# Altium PCB PCB1.PcbDoc (part 2 of 2)
Units mil, origin at the board's own origin, x right, y up, seen from the top; angles counter-clockwise.
Board outline 2043.78 x 1898.01 mil, 4 copper layers (Top Layer, Layer 1, Layer 2, Bottom Layer), stack 23.756 mil thick; 69 components, 71 nets, 323 pads, 319 vias.
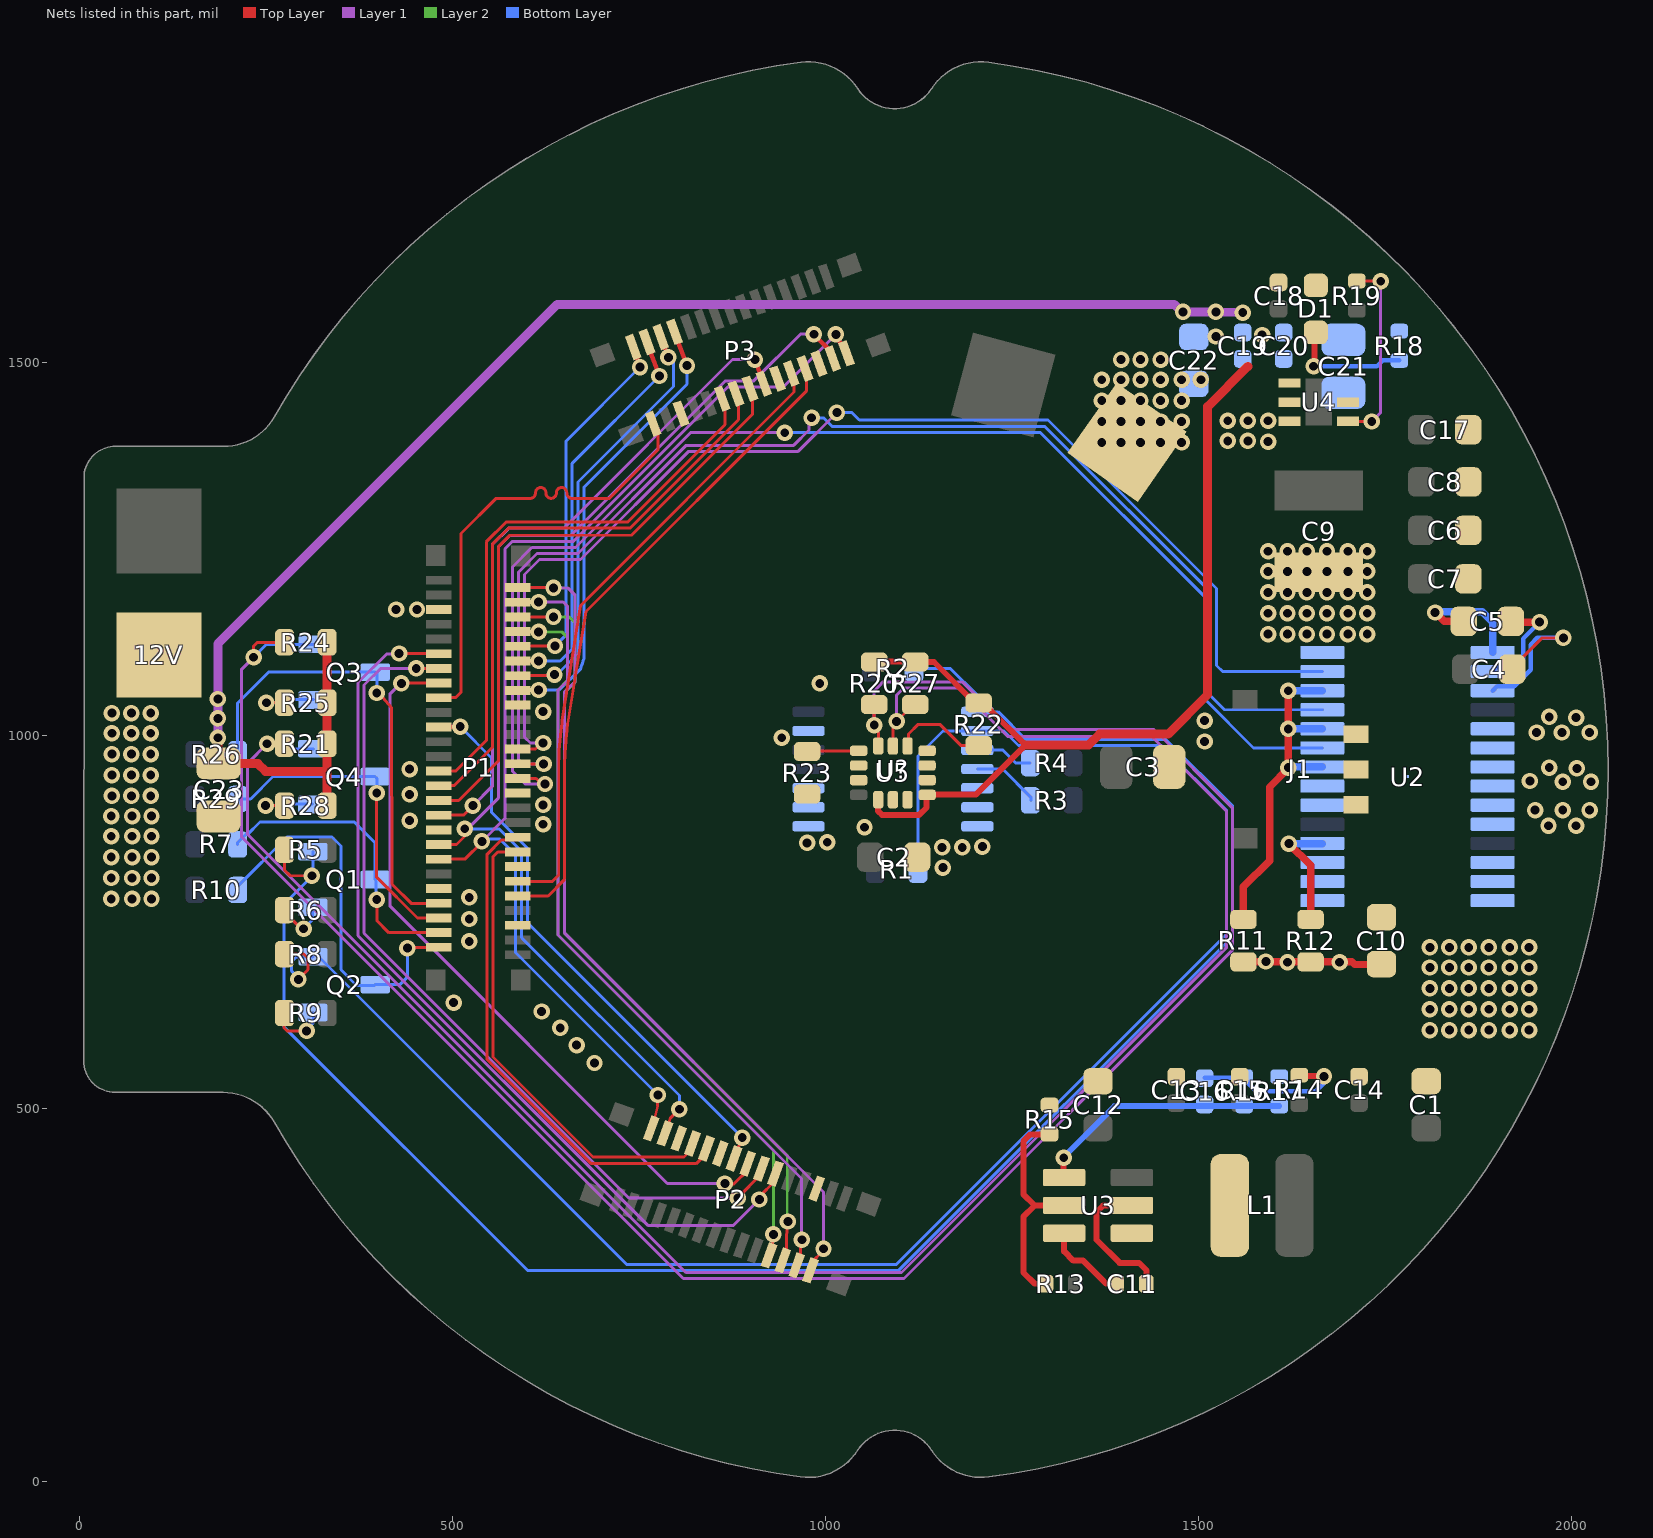
[diagram p4: the nets of this part, all layers, seen from the top]

## Via types
v1: diameter 22, hole 11.9, Top Layer to Bottom Layer, tented both sides, 318 vias
v2: diameter 22, hole 11.9, Top Layer to Bottom Layer, 1 vias

## Nets (pads, with @x,y where several pads share a name; then routed paths per layer and width w, separated by ;. In a path a pad name is that pad's centre, name@x,y a point inside that pad or via, vN(x,y) a via of type N, cw(c..) or ccw(c..) an arc to the next point about the centre after c; other vN are vias at no path point) (continued)
ETHE2_TX_P: P1.17 P3.1 | length 629
  Top Layer w4: P1.17@481.09,1050.7 503.7,1050.7 511,1058 511,1270.9 558.1,1318 601.85,1318 603.85,1318 ccw(c603.85,1325) 610.85,1325 610.85,1325.46 cw(c617.85,1325.46) 624.85,1325.46 624.85,1325 ccw(c631.85,1325) 638.85,1325 638.85,1325.46 cw(c645.85,1325.46) 652.85,1325.46 652.85,1325 ccw(c659.85,1325) 659.85,1318 685.25,1318 710,1318 775,1383 775,1412 P3.1@768,1419
GND: 12V.1 C1.2 C2.2 C3.2 C6.2 C7.2 C8.2 C9.2 C10.2 C12.2 C13.2 C14.2 C15.2 C17.2 C18.2 C19.2 C20.2 C21.2 C22.2 C23.2 D1.1 P1.5 P1.18 P1.30 P1.35 P1.40 P1.43 P1.48 P2.5 P2.19 P2.25 P3.5 P3.19 P3.25 pad.2@1404,1393 R15.2 R17.2 R23.2 U2.6 U2.7 U2.10 U2.12 U2.13 U2.14 U2.20 U2.21 U2.28 U2.29 U3.1 U4.3 U4.5 U5.2 U5.3 U5.6 U5.7 U5.9 U5.10 U5.11 U?.5 U?.6 U?.7 U?.8 U?.9 U?.10 U?.13
  other v1: 690,561 666,585 1810,605 1836,605 1862,605 1889,605 1917,605 1943,605 644,608 619,630 1810,633 1836,633 1862,633 1889,633 1917,633 1943,633 501,642 1810,661 1836,661 1862,661 1889,661 1917,661 1943,661 1810,689 1836,689 1862,689 1889,689 1917,689 1943,689 1810,716 1836,716 1862,716 1889,716 1917,716 1943,716 522,724 522,754 42,781 70,781 96,781 522,783 42,809 70,809 96,809 1157,823 42,837 70,837 96,837 1156,850 1183,850 1210,851 975,856 1002,857 42,865 70,865 96,865 1052,877 621,881 442,886 42,892 70,892 96,892 621,907 43,919 69,919 95,919 442,921 43,947 69,947 95,947 442,955 43,975 69,975 95,975 1508,992 941,997 43,1003 69,1003 95,1003 1508,1020 43,1030 69,1030 95,1030 621,1032 992,1070 1593,1136 1619,1136 1645,1136 1672,1136 1700,1136 1726,1136 1593,1164 1619,1164 1645,1164 1672,1164 1700,1164 1726,1164 424,1169 452,1169 1593,1192 1619,1192 1645,1192 1672,1192 1700,1192 1726,1192 1593,1220 1619,1220 1645,1220 1672,1220 1700,1220 1726,1220 1593,1247 1619,1247 1645,1247 1672,1247 1700,1247 1726,1247 1370,1393 1396,1393 1422,1393 1449,1393 1477,1393 1593,1394 1539,1395 1566,1395 1370,1421 1396,1421 1422,1421 1449,1421 1477,1421 1539,1422 1566,1422 1593,1422 1370,1449 1396,1449 1422,1449 1449,1449 1477,1449 1370,1477 1396,1477 1422,1477 1449,1477 1477,1477 1503,1477 1396,1504 1422,1504 1449,1504
MCU1_Main_Left_SWCLK: P1.4 P2.4 | length 1097.4
  Top Layer w4: P1.4@587,1178.65 587.18,1178.82 614.82,1178.82 v1(615,1179) ; P2.4@961,289 966.38,294.38 966.38,322.38 v1(968,324)
  Layer 1 w4: v1(615,1179) 648,1179 654,1173 654,1112.96 653.95,1112.91 653.95,1073.83 641,1060.88 641,732.69 967.59,406.1 967.59,324.41 v1(968,324)
MCU1_Main_Left_SWDIO: P1.2 P2.2 | length 1141.8
  Top Layer w4: P1.2@587,1198.33 587.17,1198.17 634.83,1198.17 v1(635,1198) ; P2.2@980,284 980,292.49 997,309.49 v1(997,312)
  Layer 1 w4: v1(635,1198) 654,1198 664,1188 664,1072.56 650.02,1058.59 650.02,734.98 997,388 v1(997,312)
MCU1_Main_Right_SWCLK: P1.12 P3.4 | length 542.2
  Top Layer w4: P1.12@587,1099.91 587.05,1099.95 v1(615,1100) v1(615,1100)
  Top Layer w6: P3.4@760,1527 v1(777,1482)
  Bottom Layer w4: v1(615,1100) 644,1100 660,1116 660,1365 v1(777,1482)
MCU1_Main_Right_SWDIO: P1.10 P3.2 | length 499.8
  Top Layer w4: P1.10@587,1119.59 587.2,1119.8 636.8,1119.8 v1(637,1120)
  Top Layer w6: P3.2@742,1521 742.02,1520.94 v1(751,1494)
  Bottom Layer w4: v1(637,1120) 652,1135 652,1395 v1(751,1494)
MCU2_Main_Left_SWCLK: P1.8 P2.8 | length 1027.4
  Top Layer w4: P1.8@587,1139.28 587.14,1139.14 615.86,1139.14 v1@616,1139 ; P2.8@923,303 928.79,308.79 928.79,330.18 v1(929.81,331.21)
  Layer 2 w4: v1(615,1139) 646,1139 654,1131 654,1074 641,1061 641,732.69 930,443.69 930,331.4 v1(929.81,331.21)
MCU2_Main_Left_SWDIO: P1.6 P2.6 | length 1067
  Top Layer w4: P1.6@587,1158.96 v1(635,1159) ; P2.6@943,296 947.31,300.31 947.31,329.42 v1(949.3,348.42)
  Layer 2 w4: v1(635,1159) 656,1159 664,1151 664,1072 650,1058 650,735 948.37,436.63 948.37,349.35 v1(949.3,348.42)
MCU2_Main_Right_SWCLK: P1.16 P3.8 | length 609
  Top Layer w4: P1.16@587,1060.54 587.23,1060.77 614.77,1060.77 v1(615,1061)
  Top Layer w6: P3.8@797.02,1540.96 v1(814,1496)
  Bottom Layer w4: v1(615,1061) 643.04,1061 670.96,1088.92 671.6,1091.21 671.6,1091.49 671.9,1092.27 672.25,1093.52 672.45,1093.73 673.73,1097.1 cw(c1092.35,954.24) 676,1103.59 676,1333 814,1471 v1(814,1496)
MCU2_Main_Right_SWDIO: P1.14 P3.6 | length 575
  Top Layer w4: P1.14@587,1080.22 587.32,1080.55 635.13,1080.55 v1(636.3,1081.72)
  Top Layer w6: P3.6@779,1534 v1(789,1507)
  Bottom Layer w4: v1(636.3,1081.72) 639.72,1081.72 668,1110 668,1340 796,1468 796,1500 v1(789,1507)
NetC4_2: C4.2 U2.3 | length 230.9
  Top Layer w4: C4.2@1921,1089 1921,1091.47 1960.53,1131 v1(1989,1131)
  Bottom Layer w6: U2.3@1894.17,1060.16 1900.03,1066.02 1923.02,1066.02 1945,1088 1945,1122 1954,1131 v1(1989,1131)
NetC5_1: C5.1 U2.2 | length 145
  Top Layer w4: C5.1@1918.5,1153 C5.1@1919.5,1152
  Top Layer w10: C5.1@1919.5,1152 v1(1957,1152)
  Bottom Layer w6: U2.2@1894.17,1085.75 1900.03,1091.61 1923.61,1091.61 1935,1103 1935,1130 v1(1957,1152)
NetC5_2: C5.2 U2.1 | length 168
  Top Layer w10: v1(1817,1165) 1829.04,1153 C5.2@1855.5,1153
  Bottom Layer w10: v1@1816,1166 1880,1166 1894.17,1151.83 U2.1@1894.17,1111.34
NetC10_1: C10.1 R11.2 R12.2 U2.15 U2.16 U2.17 | length 186.9
  Top Layer w10: R11.2@1560,696.46 1560.27,696.73 1589.73,696.73 v1(1590,697) 1590.27,696.73 1649.73,696.73 R12.2@1650,696.46 1689,696.46 1705.54,696.46 1709,693 C10.1@1745,693
  other v1: 1619,696 1689,696
NetC11_1: C11.1 U3.6 | length 112.9
  Top Layer w8: U3.6@1319.53,332.6 1319.53,308.47 1332,296 1345,296 1376,265 C11.1@1390.32,265
NetC11_2: C11.2 L1.1 U3.2 | length 191.2
  Top Layer w8: U3.2@1410.47,370 1372,370 1363,361 1363,324 1394,293 1420,293 1430,283 C11.2@1430,264
NetC16_1: C16.1 R16.2 R17.1 U3.4 | length 343.3
  Top Layer w8: U3.4@1319,408 v1(1319,434)
  Bottom Layer w8: v1@1319,435 1387.32,503.32 R16.2@1561,503.32 R17.1@1608,503.32
NetC16_2: C16.2 R14.2 R16.1 | length 214.7
  Top Layer w4: R14.2@1635,544.68 R14.2@1635.84,543.84 ; v1@1667.16,543.84 v1(1668,543)
  Top Layer w8: R14.2@1635.84,543.84 v1@1667.16,543.84
  Bottom Layer w6: C16.2@1508,541 1559,541 1577,523 1657,523 1668,534 v1(1668,543)
NetD1_2: D1.2 R18.2 | length 165.1
  Top Layer w8: v1(1654,1495) 1655.5,1496.5 1655.5,1539.01 D1.2@1657,1540.51
  Bottom Layer w6: v1(1654,1495) 1739,1495 1747,1503 R18.2@1769,1503
NetJ1_1: J1.1 U2.5
  other v1: 1953,1004 1987,1004 2024,1004 2006,1024 1970,1025
NetJ1_2: J1.2 U2.8
  other v1: 1988,938 2026,938 1944,939 2007,956 1970,957
NetJ1_3: J1.3 U2.9
  other v1: 1969,879 2006,879 1951,900 1988,900 2024,900
NetP1_24: P1.24 U2.27 | length 1648.3
  Top Layer w4: P1.24@587,981.8 610.93,981.8 619.13,990 v1(621,990)
  Layer 1 w4: v1@622,990 v1(621,990) 604,990 596.16,997.84 596.16,1215.84 616.31,1236 671.25,1236 816.25,1381 963,1381 v1(1015,1433)
  Bottom Layer w4: v1(1015,1433) 1035,1433 1045,1423 1298,1423 1524,1197 1524,1094 1532.25,1085.75 U2.27@1665.83,1085.75
NetP1_26: P1.26 U2.25 | length 1737
  Top Layer w4: P1.26@587,962.11 587.13,961.98 621.53,961.98 v1(621.67,961.85)
  Layer 1 w4: v1@622,962 594,962 588,968 588,1219 613,1244 667.94,1244 812.94,1389 957,1389 977.56,1409.56 977.56,1422.56 v1(981,1426)
  Bottom Layer w4: v1(981,1426) 997,1426 1009,1414 1294,1414 1516,1192 1516,1053 1534.43,1034.57 U2.25@1665.83,1034.57
NetP1_28: P1.28 U2.23 | length 1780.1
  Top Layer w4: P1.28@587,942.43 611.7,942.43 619.16,934.97 v1(623.64,934.97)
  Layer 1 w4: v1(623.64,934.97) 597.03,934.97 580,952 580,1226 606,1252 664.63,1252 818.63,1406 v1(945,1406)
  Bottom Layer w4: v1(945,1406) 1288,1406 1508,1186 1508,1049 1573.61,983.39 U2.23@1665.83,983.39
NetP1_45: P1.45 Q3.3 R26.1 | length 637.3
  Top Layer w4: v1(398.07,1057) 399.31,1056.9 400.77,1056.77 401.92,1055.62 417.9,1036.72 418.44,800.87 419.61,799.7 444.22,775.09 P1.45@481.09,775.09
  Bottom Layer w4: R26.1@211.54,975 211.54,1043.54 253,1085 Q3.3@396,1085 398.07,1082.93 v1(398.07,1057)
NetP1_47: P1.47 Q4.3 R29.1 | length 438.3
  Top Layer w4: v1(398.07,923) 398,922.93 398,810 452.6,755.4 P1.47@481.09,755.4
  Bottom Layer w4: R29.1@211.54,915 229,915 259,945 Q4.3@395.73,945 398.07,942.66 v1(398.07,923)
NetP1_49: P1.49 Q1.3 R7.1 | length 404.7
  Top Layer w4: v1(398.07,780) 398.07,751.93 414.28,735.72 P1.49@481.09,735.72
  Bottom Layer w4: R7.1@211.54,854 211.54,856.54 222,867 224.55,867 241.54,884 368,884 396,856 Q1.3@396,807 ; Q1.3@395.73,807 397,805.73 397,781 v1@398,780
NetP1_51: P1.51 Q2.3 R10.1 | length 525.5
  Top Layer w4: v1(439,715) 439.52,715.52 480.58,715.52 P1.51@481.09,716.03
  Bottom Layer w4: R10.1@211.54,793 211.54,797.92 277.62,864 338,864 350,852 350,686 371,665 395,665 Q2.3@396,666 429,666 439,676 v1(439,715)
NetQ1_1: Q1.1 R6.1 | length 71.1
  Top Layer w4: R6.1@274.46,766 274.46,763.46 296.92,741 v1(300,741)
  Bottom Layer w4: v1(300,741) 312,753 312,769.33 Q1.1@312.27,769.6
NetQ1_2: Q1.2 R2.2 R5.1 U?.1 | length 2600.4
  Top Layer w4: R5.1@274.46,847 274.46,819.54 282,812 v1(311,812)
  Bottom Layer w4: v1(311,812) 311,811 274,774 274,609 600,283 1098,283 1545,730 1545,906 1456.28,994.72 1268.28,994.72 1231.23,1031.77 U?.1@1203.22,1031.77 ; v1@312,812 312.27,812.27 Q1.2@312.27,844.4 ; R2.2@1118.54,1090 1167,1090 1203,1054 U?.1@1203,1032
NetQ2_1: Q2.1 R9.1 | length 80.4
  Top Layer w4: R9.1@274.46,628 274,627.54 274,608 278,604 v1(304,604)
  Bottom Layer w4: v1(304,604) 304,606 313,615 313,628.13 Q2.1@312.54,628.6
NetQ2_2: Q2.2 R1.2 R8.1 U?.2 | length 2487.5
  Top Layer w4: R8.1@274,707 R8.1@274.46,707 300,707 306,701 306,686 v1(293,673)
  Bottom Layer w4: v1(293,673) 293,675 284,684 284,697 290,703 312.13,703 Q2.2@312.54,703.4 ; Q2.2@320.75,703 732.75,291 1094.69,291 1537,733.31 1537,900 1450.28,986.72 1258.28,986.72 1238.82,1006.18 U?.2@1203.22,1006.18 1157.18,1006.18 1123.54,972.54 R1.2@1123.54,820
NetQ3_1: Q3.1 R25.1 | length 88.7
  Top Layer w4: v1(250,1044) R25.1@274,1044
  Bottom Layer w4: v1(250,1044) 276,1044 280,1048 Q3.1@313,1048
NetQ4_1: Q4.1 R28.1 | length 89.3
  Top Layer w4: v1(249,906) R28.1@274.46,906
  Bottom Layer w4: v1(249,906) 278,906 280,908 Q4.1@312,908
NetR3_2: R3.2 U?.4 | length 91.7
  Bottom Layer w4: U?.4@1203.22,955 1237.38,955 1275,917.38 R3.2@1275,913
NetR4_2: R4.2 U?.3 | length 78.1
  Bottom Layer w4: U?.3@1203.22,980.59 1237.41,980.59 1255,963 R4.2@1274,963
NetR11_1: R11.1 U2.22 U2.24 U2.26 | length 470
  Top Layer w10: R11.1@1560,753.54 1560,797 1595,832 1595,931 v1@1621,957 ; v1(1620,957) v1(1620,1009) v1(1620,1060)
  Bottom Layer w10: v1(1620,957) 1621,958 1665.62,958 U2.22@1665.83,957.8 ; v1(1620,1009) U2.24@1666,1009 ; v1(1620,1060) U2.26@1666,1060
NetR12_1: R12.1 U2.18 | length 159
  Top Layer w10: v1(1621,855) 1650,826 R12.1@1650,753.54 R12.1@1650,753
  Bottom Layer w10: v1(1621,855) U2.18@1666,855
NetR13_2: R13.2 R15.1 U3.5 | length 303.3
  Top Layer w8: R13.2@1295.32,265 1280,265 1265,280 1265,355 1280,370 ; R15.1@1300,465.32 1274.32,465.32 1265,456 1265,385 1280,370 ; U3.5@1319.53,370 1280,370
NetR19_2: R19.2 U4.4 | length 257.7
  Top Layer w4: U4.4@1700.17,1421.41 1700.58,1421 v1(1732,1421) ; R19.2@1712,1609.39 1712.2,1609.2 1744.8,1609.2 v1@1745,1609
  Layer 1 w4: v1@1732,1422 1732.96,1422 1744,1433.04 v1(1744,1609)
NetR22_2: R22.2 U5.12 | length 127.6
  Top Layer w4: U5.12@1110,986 1111,987 1111,1002 1124,1015 1153,1015 1181.54,986.46 R22.2@1205,986.46
NetR23_1: R23.1 U5.1 | length 69.6
  Top Layer w4: R23.1@975,978.54 975.98,979.53 1043.47,979.53 U5.1@1044,979
NX_CAN_H: P1.39 P2.29 P3.29 | length 1568.6
  Top Layer w4: P1.39@481.09,834.16 516.16,834.16 v1@539,857 ; P2.29@765.98,473.28 770.01,484.51 774.74,503.08 774.74,505.29 774.7,505.3 774.7,517.17 v1(775,518)
  Top Layer w6: v1@1013,1538 P3.29@1028,1511
  Layer 1 w4: v1(539,858) 570,889 570,1250.37 579.97,1260.34 661.66,1260.34 868.81,1467.5 943.3,1467.5 v1(1013.55,1537.75)
  Bottom Layer w4: v1(539,858) 542.44,861.44 550.29,861.44 550.34,861.49 562.51,861.49 584,840 584,709 v1(775,518)
NX_CAN_L: P1.37 P2.27 P3.27 | length 1592.4
  Top Layer w4: P1.37@481.09,853.85 504.85,853.85 517,866 v1@517,875 ; P2.27@784.34,466.89 789.01,479.72 791.58,486.77 v1(803.77,498.96)
  Top Layer w6: v1(984,1538) 984,1537.69 1009.27,1512.42 P3.27@1009.27,1505.52
  Layer 1 w4: v1(516,875) 520.04,875 561,915.96 561,1252.69 576.66,1268.34 658.34,1268.34 865.5,1475.5 903.5,1475.5 966,1538 v1@983,1538
  Bottom Layer w4: v1(516,875) 562,875 592,845 592,729 803.77,517.23 803.77,499.23 v1@804,499
PWM_1: P1.15 P2.15 | length 1006.5
  Top Layer w4: v1(431,1070) 431.19,1070.19 480.9,1070.19 P1.15@481.09,1070.38 ; v1(864.73,399.43) 865.16,399 877,399 896,418 P2.15@896,426
  Layer 1 w4: v1(431,1070) 430,1070 416,1056 416,771 787.57,399.43 864.57,399.43 v1@865,399
PWM_2: P1.31 P3.15 | length 839.3
  Top Layer w4: P1.31@481.09,912.9 507.9,912.9 561,966 561,1253.02 576.49,1268.51 739.45,1268.51 902.06,1431.12 902.06,1460.94 P3.15@898,1465
RS232_ENC_Left_RX: P1.13 P2.13 | length 1142.8
  Top Layer w4: v1(451,1090) P1.13@481.06,1090.03 ; v1(882,380) 882,380.43 913.97,412.4 P2.13@913.97,419.42
  Layer 1 w4: v1(451,1090) 403.31,1090 381,1067.69 381,735 736,380 v1(882,380)
RS232_ENC_Left_TX: P1.11 P2.11 | length 1219.6
  Top Layer w4: v1(428,1110) 428.12,1109.88 480.97,1109.88 P1.11@481.09,1109.75 ; v1(911,378) 911,381.77 932,402.77 P2.11@932,412
  Layer 1 w4: v1(428,1110) 427,1109 411,1109 373,1071 373,731.69 761.37,343.32 876.32,343.32 v1(911,378)
RS232_ENC_Right_RX: P1.29 P3.13 | length 800.6
  Top Layer w4: P1.29@481.09,932.59 481.19,932.68 501.68,932.68 553,984 553,1256.33 574.67,1278 737.63,1278 883,1423.37 883,1455 P3.13@880,1458
RS232_ENC_Right_TX: P1.27 P3.11 | length 769.2
  Top Layer w4: P1.27@481.09,952.27 481.22,952.4 504.02,952.4 545,993.37 545,1259.64 571.36,1286 734.31,1286 865,1416.69 865,1448 P3.11@861,1452
RS232_RX1: P1.38 P2.23 | length 638.6
  Top Layer w4: P1.38@587,844 560.36,844 554,837.64 554,569 688,435 809.8,435 822,447.2 P2.23@822,453
RS232_RX2: P1.44 P3.23 | length 882.2
  Top Layer w4: P1.44@587,784.93 627.93,784.93 648.85,805.85 650.02,809.69 650.02,954.24 cw(c1092.35,954.24) 650.06,959.86 650.27,976.53 651.74,993.14 cw(c1092.35,954.24) 652.41,1000.08 654.07,1016.02 670,1113.78 678.52,1166.21 679.17,1166.86 974,1461.69 974,1490 P3.23@972,1492
RS232_TX1: P1.36 P2.21 | length 690.5
  Top Layer w4: P1.36@587,863.69 583.09,859.78 564.82,859.78 546,840.96 546,565.69 685.69,426 826.21,426 840,439.79 P2.21@840,447
RS232_TX2: P1.42 P3.21 | length 852.8
  Top Layer w4: P1.42@587,804.62 633.64,804.62 640.85,811.83 642.02,813 642.02,957.55 642.27,976.89 642.31,979.89 644.33,999.72 cw(c1092.35,954.24) 644.41,1000.5 646.08,1016.76 646.4,1019.69 646.42,1019.78 671.13,1174.13 957.55,1460.55 957.55,1481.45 P3.21@954,1485
SBUS_1: P1.21 P2.17 | length 766.8
  Top Layer w4: P2.17@877,433 v1(888,461)
  Top Layer w6: P1.21@481.09,1011.33 481.43,1011.66 509.66,1011.66 v1(510,1012)
  Bottom Layer w4: v1(510,1012) 552,970 552,897 600,849 600,749 v1(888,461)
SBUS_2: P1.33 P3.17 | length 900.9
  Top Layer w4: P1.33@481.09,893.22 514.22,893.22 v1(527,906)
  Top Layer w6: v1(905,1504) P3.17@917,1472
  Layer 1 w4: v1(527,906) 553,932 553,1256 575,1278 649,1278 875,1504 v1(905,1504)
SCL_IMU1: Q4.2 R21.2 R27.1 U5.13 | length 2759.5
  Top Layer w4: v1(251,989) 274,989 R21.2@275,990 ; U5.13@1090,986.02 1090,1014 1117,1041 R27.1@1120,1041
  Layer 1 w4: v1(251,989) 225,963 225,867.31 812.31,280 1101.69,280 1537,715.31 1537,898.69 1436.69,999 1243.69,999 1178.69,1064 1105,1064 1095,1054 v1(1095,1019)
  Bottom Layer w4: v1(251,989) 272,989 279,982 Q4.2@313,982
SDA_IMU1: Q3.2 R20.2 R24.1 U5.14 | length 2997.1
  Top Layer w4: v1(233,1105) 233,1120 238,1125 R24.1@274.46,1125 R24.1@275,1125 ; R20.2@1065,1041.46 v1(1065,1014) 1065,1009.34 1071,1003.34 U5.14@1071,986
  Layer 1 w4: v1(233,1105) 217,1089 217,864 809,272 1105,272 1545,712 1545,903 1440,1008 1247,1008 1183,1072 1077,1072 1065,1060 v1@1065,1016
  Bottom Layer w4: v1(233,1105) 250,1122 Q3.2@313,1122
VDD: C19.1 C20.1 C21.1 C22.1 C23.1 R18.1 R20.1 R21.1 R22.1 R24.2 R25.2 R27.2 R28.2 U4.1 U4.2 U5.5 U5.8 | length 3341.7
  Top Layer w8: R20.1@1065,1098.54 1065.68,1099.23 1119.32,1099.23 R27.2@1120,1098.54 1145.08,1098.54 1199.94,1043.68 R22.1@1204.86,1043.68 ; U5.5@1070.32,913.68 1070.32,898.68 1075.32,893.68 1125.32,893.68 1135.18,903.55 1135.18,919.79 U5.8@1135.87,920.47 ; U5.8@1136.08,920.68 1201.32,920.68 1265.66,985.03 1265.66,988.21 ; R22.1@1205,1043.54 1211.22,1043.54 1220.01,1034.75 1220.25,1034.75 1266.22,988.78 1268,987
  Top Layer w12: v1(185,997) 185,964 C23.1@186,963 ; C23.1@186,962.43 238.57,962.43 249,952 331.54,952 ; R28.2@331.54,906.54 331.54,952 ; R24.2@331.54,1125 R25.2@331.54,1044 R21.1@331.54,989 331.54,952 ; 1268.8,987 1352,987 1367,1002 1459,1002 1512,1055 1512,1441 1566,1495
  Layer 1 w12: v1(185,997) v1(185,1023) v1(185,1049) 185,1123 640,1578 1466.97,1578 1476.97,1568 v1(1479,1568) v1(1523,1568) 1523.5,1567.5 1558.5,1567.5 v1(1559,1567)
  other v1: 1523,1535 1585,1537
pads on no net: J1.4 J1.5 P1.0 P1.20 P1.22 P1.32 P1.34 P1.46 P1.50 P1.52 P2.0 P2.10 P2.12 P2.14 P2.16 P2.20 P2.22 P2.24 P2.26 P2.28 P2.30 P3.0 P3.10 P3.12 P3.14 P3.16 P3.20 P3.22 P3.24 P3.26 P3.28 P3.30 U2.19 U4.7 U5.4 U?.14
copper on no net: | length 6408.8
  Top Layer w10: 253,675 ccw(c168,675) 253,675 ; 1463,1762 ccw(c1378,1762) 1463,1762 ; 1464,146 ccw(c1379,146) 1464,146
  Layer 1 w10: 252,675 ccw(c167,675) 252,675 ; 1464,145 ccw(c1379,145) 1464,145 ; 1464,1763 ccw(c1379,1763) 1464,1763
  Layer 2 w10: 251,674 ccw(c166,674) 251,674 ; 1463,1761 ccw(c1378,1761) 1463,1761 ; 1464,145 ccw(c1379,145) 1464,145
  Bottom Layer w10: 252,675 ccw(c167,675) 252,675 ; 1463,1761 ccw(c1378,1761) 1463,1761 ; 1464.23,146.23 ccw(c1379.23,146.23) 1464.23,146.23

## Polygon pours and split planes (outlines as drawn)
GND on Bottom Layer "GND_L04_P018" (solid, remove dead copper, pour order 18): 47.39,521.34 90.46,521.3 192.31,521.3 cw(c192.24,442.42) 260.78,481.46 ccw(c1092.68,954.09) 966.13,5.71 ccw(c976.55,83.76) 1042.87,41.3 cw(c1092.61,9.42) 1142.35,41.3 ccw(c1208.61,83.65) 1219.05,5.71 ccw(c1092.59,954.01) 1218.61,1902.36 ccw(c1208.25,1824.28) 1142.16,1867.12 cw(c1092.59,1899.19) 1043.02,1867.12 ccw(c976.97,1824.38) 966.57,1902.36 ccw(c1092.71,953.83) 261.05,1427.09 cw(c192.62,1466.01) 192.59,1387.28 47.83,1387.4 ccw(c47.76,1345.46) 5.82,1345.43 5.5,563.27 ccw(c47.44,563.28)
VDD on Bottom Layer "NONET_L-01_P-001" (solid, pour order 13): 1465,1583 1465,1515 1539,1515 1549,1525 1647,1525 1667,1505 1725,1505 1748,1528 1786,1528 1786,1583
NetJ1_3 on Bottom Layer "NONET_L-01_P-001" (solid, remove dead copper, pour order 1): 1864,916 2034,916 2042,908 2042,878 2030,866 1954,866 1923,897 1864,897
NetJ1_1 on Bottom Layer "NONET_L-01_P-001" (solid, remove dead copper, pour order 2): 1864,1000 1925,1000 1947,986 2031,986 2044,999 2044,1020 2026,1038 1962.12,1038 1925,1018 1864,1018
NetC10_1 on Bottom Layer "NETC10_1_L04_P010" (solid, pour order 10): 1636,839 1573,751.82 1573,685 1579,679 1702,679 1717,694 1717,728 1696,749 1696,839
12V on Bottom Layer "12V_L04_P009" (solid, remove dead copper, pour order 9): 1864,865 1924,865 1949,860 2025,860 2033,852 2033,827 2008,802 1968,802 1924,846 1864,846
12V on Bottom Layer "12V_L04_P008" (solid, remove dead copper, pour order 8): 1864,1025 1926,1025 1963.27,1046 2023,1046 2033,1056 2033,1094 2020,1107 1974.67,1107 1925.69,1044 1864,1044
NetJ1_2 on Bottom Layer "NONET_L-01_P-001" (solid, remove dead copper, pour order 0): 1864,923 2036,923 2043,930 2043,970 1954,970 1933.32,949.32 1926,942 1864,942
GND on Top Layer "GND_L01_P019" (solid, remove dead copper, pour order 19): 47.39,521.34 90.46,521.3 192.31,521.3 cw(c192.24,442.42) 260.78,481.46 ccw(c1092.68,954.09) 966.13,5.71 ccw(c976.55,83.76) 1042.87,41.3 cw(c1092.61,9.42) 1142.35,41.3 ccw(c1208.61,83.65) 1219.05,5.71 ccw(c1092.59,954.01) 1218.61,1902.36 ccw(c1208.25,1824.28) 1142.16,1867.12 cw(c1092.59,1899.19) 1043.02,1867.12 ccw(c976.97,1824.38) 966.57,1902.36 ccw(c1092.71,953.83) 261.05,1427.09 cw(c192.62,1466.01) 192.59,1387.28 47.83,1387.4 ccw(c47.76,1345.46) 5.82,1345.43 5.5,563.27 ccw(c47.44,563.28)
VDD on Top Layer "NONET_L-01_P-001" (solid, pour order 11): 1637,1440 1637,1509 1588,1558 1588,1583 1465,1583 1465,1515 1539,1515 1606,1448 1606,1440
12V on Top Layer "12V_L01_P014" (solid, remove dead copper, pour order 14): 0,1364 0,1190 327,1190 678.5,1541.5 1042.77,1669 1141.9,1586.67 1141.9,1382.84 1277.38,1344.43 1538.08,1837.92 1447,1929 565,1929
12V on Top Layer "12V_L01_P022" (solid, remove dead copper, pour order 22): 1578,1356 1741,1356 1741,1270 1740,1271 1578,1271
12V on Top Layer "12V_L01_P016" (solid, remove dead copper, pour order 16): 1344,492 1344,432 1381,395 1440,395 1440,453 1482,495 1482,519 1407,519 1380,492
+5V on Top Layer "NONET_L-01_P-001" (solid, pour order 7): 1602,300 1602,431 1538,495 1538,518 1541,521 1764,521 1791,494 1824,494 1828,490 1828,455 1822,449 1672,449 1655,432 1655,300
NetC11_2 on Top Layer "NETC11_2_L01_P006" (solid, remove dead copper, pour order 6): 1377,353 1444,353 1516,298 1564,298 1573,307 1573,432 1563,442 1520,442 1444,386 1377,386
NetJ1_3 on Top Layer "NONET_L-01_P-001" (solid, pour order 5): 1693,920 1860,920 2030,920 2039,911 2039,875 2022,858 1782.49,858 1693,895
NetJ1_2 on Top Layer "NONET_L-01_P-001" (solid, pour order 4): 1693,942 1795,925 2035,925 2043,933 2043,975 2036,982 1795,982 1693,968
NetJ1_1 on Top Layer "NONET_L-01_P-001" (solid, pour order 3): 1693,989 2034,989 2040,995 2040,1035 2022,1053 1795,1053 1693,1014
GND on Layer 2 "GND_L03_P021" (solid, remove dead copper, pour order 21): 47.39,521.34 90.46,521.3 192.31,521.3 cw(c192.24,442.42) 260.78,481.46 ccw(c1092.68,954.09) 966.13,5.71 ccw(c976.55,83.76) 1042.87,41.3 cw(c1092.61,9.42) 1142.35,41.3 ccw(c1208.61,83.65) 1219.05,5.71 ccw(c1092.59,954.01) 1218.61,1902.36 ccw(c1208.25,1824.28) 1142.16,1867.12 cw(c1092.59,1899.19) 1043.02,1867.12 ccw(c976.97,1824.38) 966.57,1902.36 ccw(c1092.71,953.83) 261.05,1427.09 cw(c192.62,1466.01) 192.59,1387.28 47.83,1387.4 ccw(c47.76,1345.46) 5.82,1345.43 5.5,563.27 ccw(c47.44,563.28)
12V on Layer 2 "12V_L03_P015" (solid, remove dead copper, pour order 15): 1085,1919 1085,1377 1176,1377 1754,799 2058,799 2058,1364 1503,1919
GND on Layer 1 "GND_L02_P020" (solid, remove dead copper, pour order 20): 47.39,521.34 90.46,521.3 192.31,521.3 cw(c192.24,442.42) 260.78,481.46 ccw(c1092.68,954.09) 966.13,5.71 ccw(c976.55,83.76) 1042.87,41.3 cw(c1092.61,9.42) 1142.35,41.3 ccw(c1208.61,83.65) 1219.05,5.71 ccw(c1092.59,954.01) 1218.61,1902.36 ccw(c1208.25,1824.28) 1142.16,1867.12 cw(c1092.59,1899.19) 1043.02,1867.12 ccw(c976.97,1824.38) 966.57,1902.36 ccw(c1092.71,953.83) 261.05,1427.09 cw(c192.62,1466.01) 192.59,1387.28 47.83,1387.4 ccw(c47.76,1345.46) 5.82,1345.43 5.5,563.27 ccw(c47.44,563.28)

## Keep-outs
Keep-Out Layer:
  the board outline again, w0.5

## Other copper
Multi-Layer:
  pour cut-out: 1244.03,868.7 cw(c1092.35,954.25) 1244.07,1039.72 ccw(c1280.99,1060.45) 1281.04,1018.11 1415.37,1018.11 ccw(c1415.34,1099.88) 1489.9,1133.47 ccw(c1092.35,954.24) 1489.86,774.92 ccw(c1415.31,808.51) 1415.33,890.28 1280.96,890.28 ccw(c1280.97,847.87)
  lines w0.5: 1244.03,868.7 cw(c1280.97,847.87) 1280.96,890.28 1415.33,890.28 cw(c1415.31,808.51) 1489.86,774.92 cw(c1092.35,954.24) 1489.9,1133.47 cw(c1415.34,1099.88) 1415.37,1018.11 1281.04,1018.11 cw(c1280.99,1060.45) 1244.07,1039.72 ccw(c1092.35,954.25) 1244.03,868.7

## Silkscreen, mask and mechanical layers (free items; w line width, h text height)
Top Overlay:
  circle w5: c1379,1762 r90
  circle w5: c1380,145 r90
  circle w5: c167,675 r90
  circle w0.5: c1378.33,147.16 r43.31
  circle w0.5: c1378.33,1761.33 r43.31
  circle w0.5: c167.13,678.93 r43.31
  lines w10: 450,630 615,630 615,1285 450,1285 450,630 ; 636.86,373.94 694.28,531.7 1104.93,382.23 1047.51,224.47 636.86,373.94 ; 650.66,1520.62 707.49,1364.47 1120.55,1514.81 1063.71,1670.96 650.66,1520.62 ; 1535,840 1740,840 1740,1070 1535,1070 1535,840
  text "C ROLL TO RIGHT" at 652.78,1535.61 h55 r20
  text "12V" at 1281.39,1533.37 h50 r75
  text "C ROLL OMNISIGHT v2.0 / eal-time Robotics" at 531,1518 h35 r30
  text "R" at 461.32,1494.32 h90 r30
  text "GND" at 1470.51,1447.49 h50 r60
  text "C ROLL FROM YAW" at 440.18,669 h70 r90
  text "C ROLL TO LEFT" at 1021.78,221.39 h55 r160
Mechanical 1:
  circle w0.5: c373.33,756.33 r43.31
  circle w0.5: c373.33,756.33 r43.31
  circle w0.5: c373.33,756.33 r43.31
  circle w0.5: c373.33,756.33 r43.31
  circle w0.5: c373.33,756.33 r43.31
  lines w0.5: 1043.02,1867.12 ccw(c1092.59,1899.19) 1142.16,1867.12 ; 1043.02,1867.13 ccw(c976.97,1824.38) 966.57,1902.36 ccw(c1092.71,953.83) 261.05,1427.09 cw(c192.62,1466.01) 192.59,1387.28 47.83,1387.4 ccw(c47.76,1345.46) 5.82,1345.43 5.5,563.27 ccw(c47.44,563.28) 47.39,521.34 90.46,521.3 192.31,521.3 cw(c192.24,442.42) 260.78,481.46 ccw(c1092.68,954.09) 966.13,5.71 ccw(c976.55,83.76) 1042.87,41.3 cw(c1092.61,9.42) 1142.35,41.3 ccw(c1208.61,83.65) 1219.05,5.71 ccw(c1092.59,954.01) 1218.61,1902.36 ccw(c1208.25,1824.28) 1142.16,1867.13